# Altium PCB Oled.PcbDoc
Units mil, origin at the board's own origin, x right, y up, seen from the top; angles counter-clockwise.
Board outline 1181.1 x 909.45 mil, 2 copper layers (Top Layer, Bottom Layer); 8 components, 14 nets, 49 pads, 6 vias.
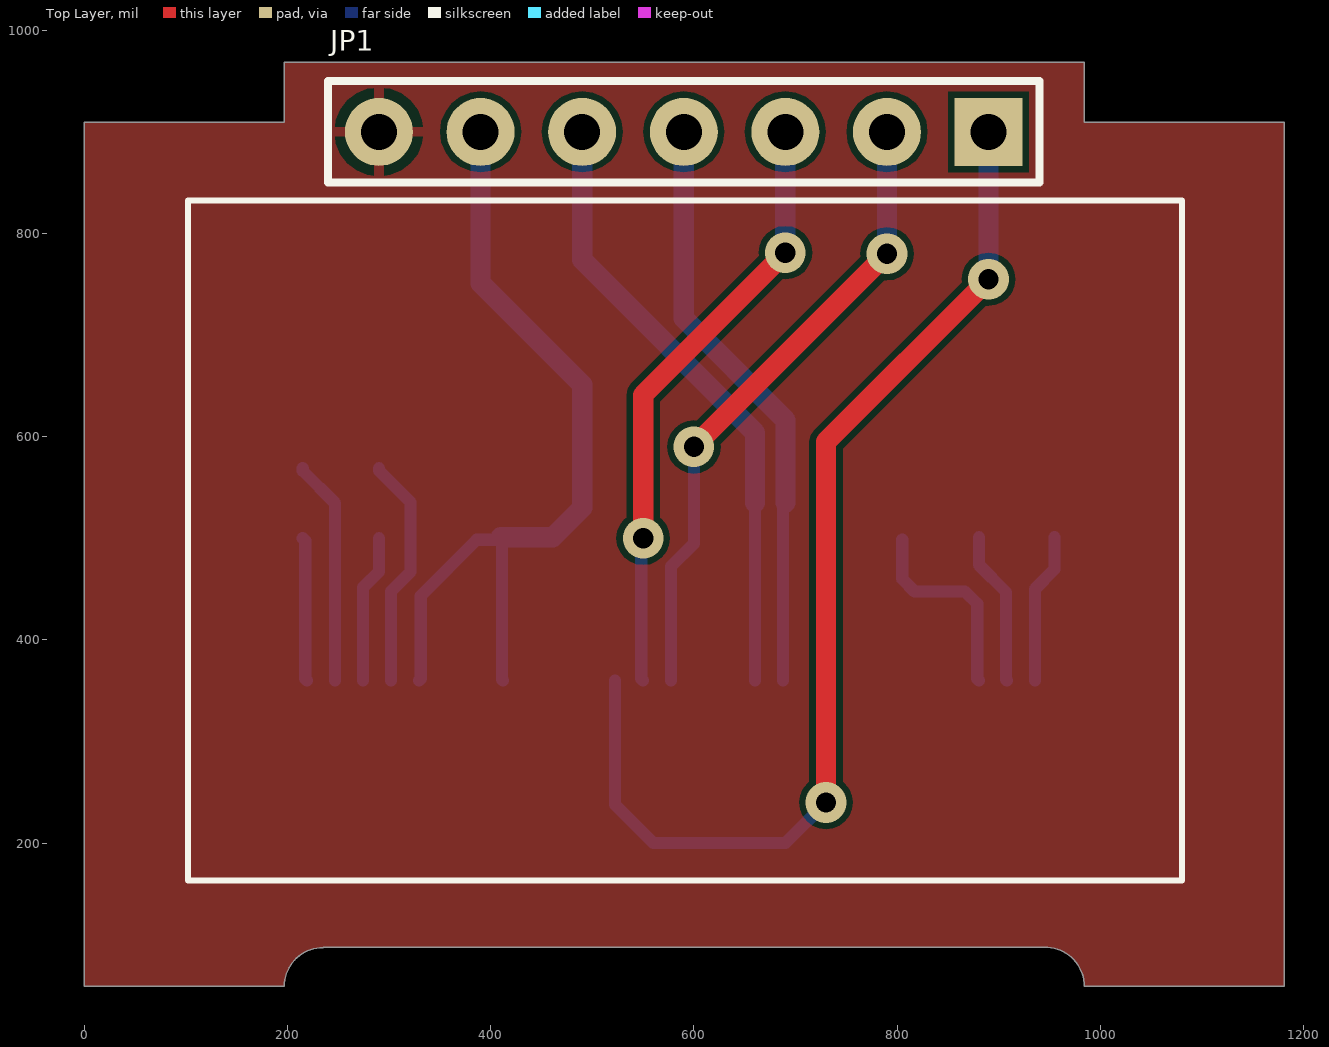
[diagram p0: Top Layer view]
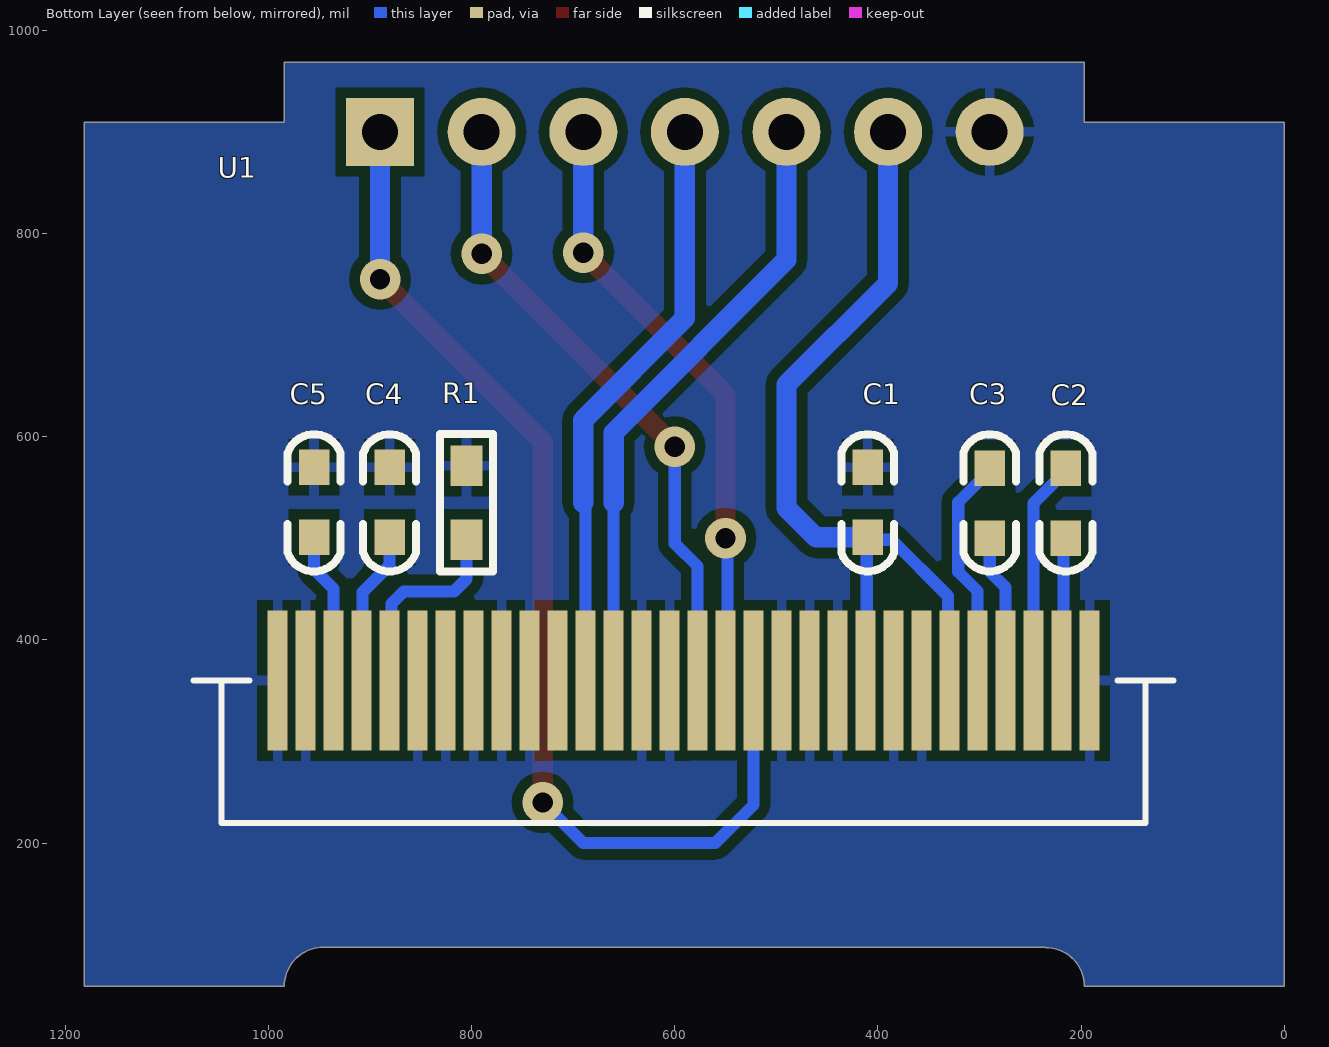
[diagram p1: Bottom Layer view, seen from below]

## Layer stack, top to bottom
Top Solder: solder mask 0.4, Solder Resist, Dk 3.5
Top Layer: signal copper 1.4
Dielectric 1: dielectric 12.6, FR-4, Dk 4.8
Bottom Layer: signal copper 1.4
Bottom Solder: solder mask 0.4, Solder Resist, Dk 3.5

## Board outline
0,59.06 0,909.45 196.85,909.45 196.85,968.5 984.25,968.5 984.25,909.45 1181.1,909.45 1181.1,59.06 984.25,59.06 ccw(c945.75,59.06) 945.02,97.55 235.35,97.55 235,97.2 ccw(c235,59.06) 196.85,59.06

## Design rules (kind name [scope] priority, off if disabled: settings)
Clearance [All] p1: gap=6 ignorepadtopadclearanceinfootprint=FALSE
HoleToHoleClearance [All] p1: gap=2 allowstackedmicrovias=TRUE
MinimumSolderMaskSliver [All] p1: minsoldermaskwidth=2
PolygonConnect [All] p1: connectstyle=Relief reliefconductorwidth=10 reliefentries=4 polygonreliefangle="90 Angle" airgapwidth=10
RoutingVias [All] p1: holewidth=6 width=12 viastyle="Through Hole" minholewidth=6 minwidth=12 maxholewidth=28 maxwidth=50
SilkToSilkClearance [All] p1: silktosilkclearance=2
SilkToSolderMaskClearance [IsPad] p1: minsilkscreentomaskgap=2 clearancetoexposedcopper=TRUE
SolderMaskExpansion [All] p1: expansion=4
Width [All] p1: maxlimit=50 minlimit=10 preferedwidth=50 minimp=50.000000 maximp=50.000000 favimp=50.000000
26 further rules are at their usual default settings.

## Components (designator, comment, footprint, x,y, rotation, side; value= is the part's Value field where it differs from the comment)
C1 "2.2uF" "C 0603" 410,535 r270 bottom
C2 "1uF" "C 0603" 215,535 r90 bottom
C3 "1uF" "C 0603" 290,535 r90 bottom
C4 "2.2uF" "C 0603" 880.59,534.96 r270 bottom
C5 "2.2uF" "C 0603" 955,534.96 r270 bottom
JP1 "HDR-1X7" HDR-1X7 890,900 r180 top
R1 "910K" "R 0603" 805,535 r270 bottom
U1 "OLED 0.96" "OLED 0.96 - TWO" 591.22,360 r180 bottom locked

## Footprints (in the part's own frame and the unit in brackets; to place one, negate y for a bottom-side part, rotate by r counter-clockwise, add the part's x,y. Pads: shape width x height; smd on the part's side, far side on the other; paste and mask are expansions set on the pad)
"C 0603" [mil] "无极性贴片电容"
  rect 35x30 smd: 1(-35,0) 2(34,0)
  silkscreen extent -67,-26 67,26, body extent -31,-16 31,16, height 32
HDR-1X7 [mm] "排针，8脚"
  rect 1.7x1.7 hole 0.9: 1(0,0)
  round 1.7 hole 0.9: 2(2.54,0) 3(5.08,0) 4(7.62,0) 5(10.16,0) 6(12.7,0) 7(15.24,0)
  silkscreen extent -1.27,-1.27 16.51,1.27, body extent -1.27,-1.27 16.51,1.27, height 8.5
"OLED 0.96 - TWO" [mm]
  rect 0.5x3.5 smd: 1(10.15,0) 2(9.45,0) 3(8.75,0) 4(8.05,0) 5(7.35,0) 6(6.65,0) 7(5.95,0) 8(5.25,0) 9(4.55,0) 10(3.85,0) 11(3.15,0) 12(2.45,0) 13(1.75,0) 14(1.05,0) 15(0.35,0) 16(-0.35,0) 17(-1.05,0) 18(-1.75,0) 19(-2.45,0) 20(-3.15,0) 21(-3.85,0) 22(-4.55,0) 23(-5.25,0) 24(-5.95,0) 25(-6.65,0) 26(-7.35,0) 27(-8.05,0) 28(-8.75,0) 29(-9.45,0) 30(-10.15,0)
  silkscreen extent -12.25,-3.56 12.25,0, body extent -12.25,11.94 -12.25,11.94, height 2.54
"R 0603" [mil] "1/10W贴片电阻"
  rect 40x31.5 smd: 1(-36.5,0) 2(36.5,0)
  silkscreen extent -68,-26 68,26, body extent -31,-16 31,16, height 16

## Part data
C1 C2 C3 C4 C5: library part C, "无极性贴片电容"
JP1: library part "Header 7", "7P接插件", BOM名称=7, 学习资源=https://lmdzstyle.ta
R1: library part R, "贴片电阻"

## Via types
v1: diameter 40, hole 20, Top Layer to Bottom Layer, tented both sides, 6 vias

## Nets (pads, with @x,y where several pads share a name; then routed paths per layer and width w, separated by ;. In a path a pad name is that pad's centre, name@x,y a point inside that pad or via, vN(x,y) a via of type N, cw(c..) or ccw(c..) an arc to the next point about the centre after c; other vN are vias at no path point)
3.3V: C1.2 JP1.6 U1.6 U1.9 | length 833.5
  Bottom Layer w12: U1.6 331.13,361.72 331.13,443.29 386.33,498.5 410,498.5 C1.2 411.04,499.96 411.04,361.04 U1.9
  Bottom Layer w20: JP1.6 390,751.15 490,651.15 490,530 461,501 C1.2
GND: C1.1 C4.1 C5.1 JP1.7 R1.1 U1.1 U1.7 U1.8 U1.10 U1.11 U1.12 U1.16 U1.17 U1.21 U1.22 U1.23 U1.24 U1.25 U1.29 U1.30
MOSI: JP1.4 U1.19 | length 582.5
  Bottom Layer w12: U1.19 687.68,532.44 690.12,534.88
  Bottom Layer w20: JP1.4 590,716.58 690.12,616.46 690.12,534.88
NetC2_1: C2.1 U1.2 | length 141.7
  Bottom Layer w12: C2.1 217.46,497.54 217.46,361.72 U1.2
NetC2_2: C2.2 U1.3 | length 222.1
  Bottom Layer w12: C2.2 215,566.5 246.73,534.77 U1.3
NetC3_1: C3.1 U1.4 | length 146.5
  Bottom Layer w12: U1.4 274.29,451.49 290,467.19 C3.1
NetC3_2: C3.2 U1.5 | length 229.8
  Bottom Layer w12: C3.2 290,566.5 321,535.5 321,467.08 301.85,447.93 U1.5
NetC4_2: C4.2 U1.27 | length 152.4
  Bottom Layer w12: C4.2 880.59,473.62 907.31,446.9 907.31,360.84 U1.27
NetC5_2: C5.2 U1.28 | length 149
  Bottom Layer w12: U1.28 935.71,450.19 955,469.49 C5.2
NetR1_2: R1.2 U1.26 | length 198.7
  Bottom Layer w12: R1.2 805,460 817.24,447.76 866.64,447.76 878.87,435.53 878.87,361.72 U1.26
OLED_CS: JP1.1 U1.13 | length 1088.4
  Top Layer w20: v1(730,240) 730,595 v1(890,755)
  Bottom Layer w12: U1.13 522.32,237.68 560,200 690,200 v1(730,240)
  Bottom Layer w20: v1(890,755) JP1.1
OLED_D/C: JP1.2 U1.15 | length 628
  Top Layer w20: v1(600,590) v1(790,780)
  Bottom Layer w12: U1.15 577.44,472.44 600,495 v1(600,590)
  Bottom Layer w20: v1(790,780) JP1.2
OLED_RES: JP1.3 U1.14 | length 599.5
  Top Layer w20: v1(550,500) 550,641.15 v1(690,781.15)
  Bottom Layer w12: U1.14 548.17,361.72 548.17,498.17 v1(550,500)
  Bottom Layer w20: v1(690,781.15) JP1.3
SCK: JP1.5 U1.18 | length 610.5
  Bottom Layer w12: U1.18 660.12,535.12
  Bottom Layer w20: JP1.5 490,774.15 660.12,604.03 660.12,535.12
pads on no net: U1.20

## Polygon pours and split planes (outlines as drawn)
GND on Top Layer "Top Layer-GND" (solid, pour order 0): 0,59.06 0,909.45 196.85,909.45 196.85,968.5 984.25,968.5 984.25,909.45 1181.1,909.45 1181.1,59.06 984.25,59.06 ccw(c945.75,59.06) 945.02,97.55 235.35,97.55 235,97.2 ccw(c235,59.06) 196.85,59.06
GND on Bottom Layer "Bottom Layer-GND" (solid, remove dead copper, pour order 2): 0,59.06 0,909.45 196.85,909.45 196.85,968.5 984.25,968.5 984.25,909.45 1181.1,909.45 1181.1,59.06 984.25,59.06 ccw(c945.75,59.06) 945.02,97.55 235.35,97.55 235,97.2 ccw(c235,59.06) 196.85,59.06

## Silkscreen, mask and mechanical layers (free items; w line width, h text height)
Mechanical 1:
  lines w6: 235,97.2 ccw(c235,59.06) 196.85,59.06 0,59.06 0,909.45 196.85,909.45 196.85,968.5 984.25,968.5 984.25,909.45 1181.1,909.45 1181.1,59.06 984.25,59.06 ccw(c945.75,59.06) 945.02,97.55 235.35,97.55